# Altium PCB FMCOMMS3.PcbDoc (part 2 of 3)
Units mil, origin at the board's own origin, x right, y up, seen from the top; angles counter-clockwise.
Board outline 3368 x 2770 mil, 4 copper layers (Top Layer, Layer 1, Layer 2, Bottom Layer), stack 23.756 mil thick; 160 components, 137 nets, 746 pads, 735 vias.
Unrouted connection lines stored in the file: 16.
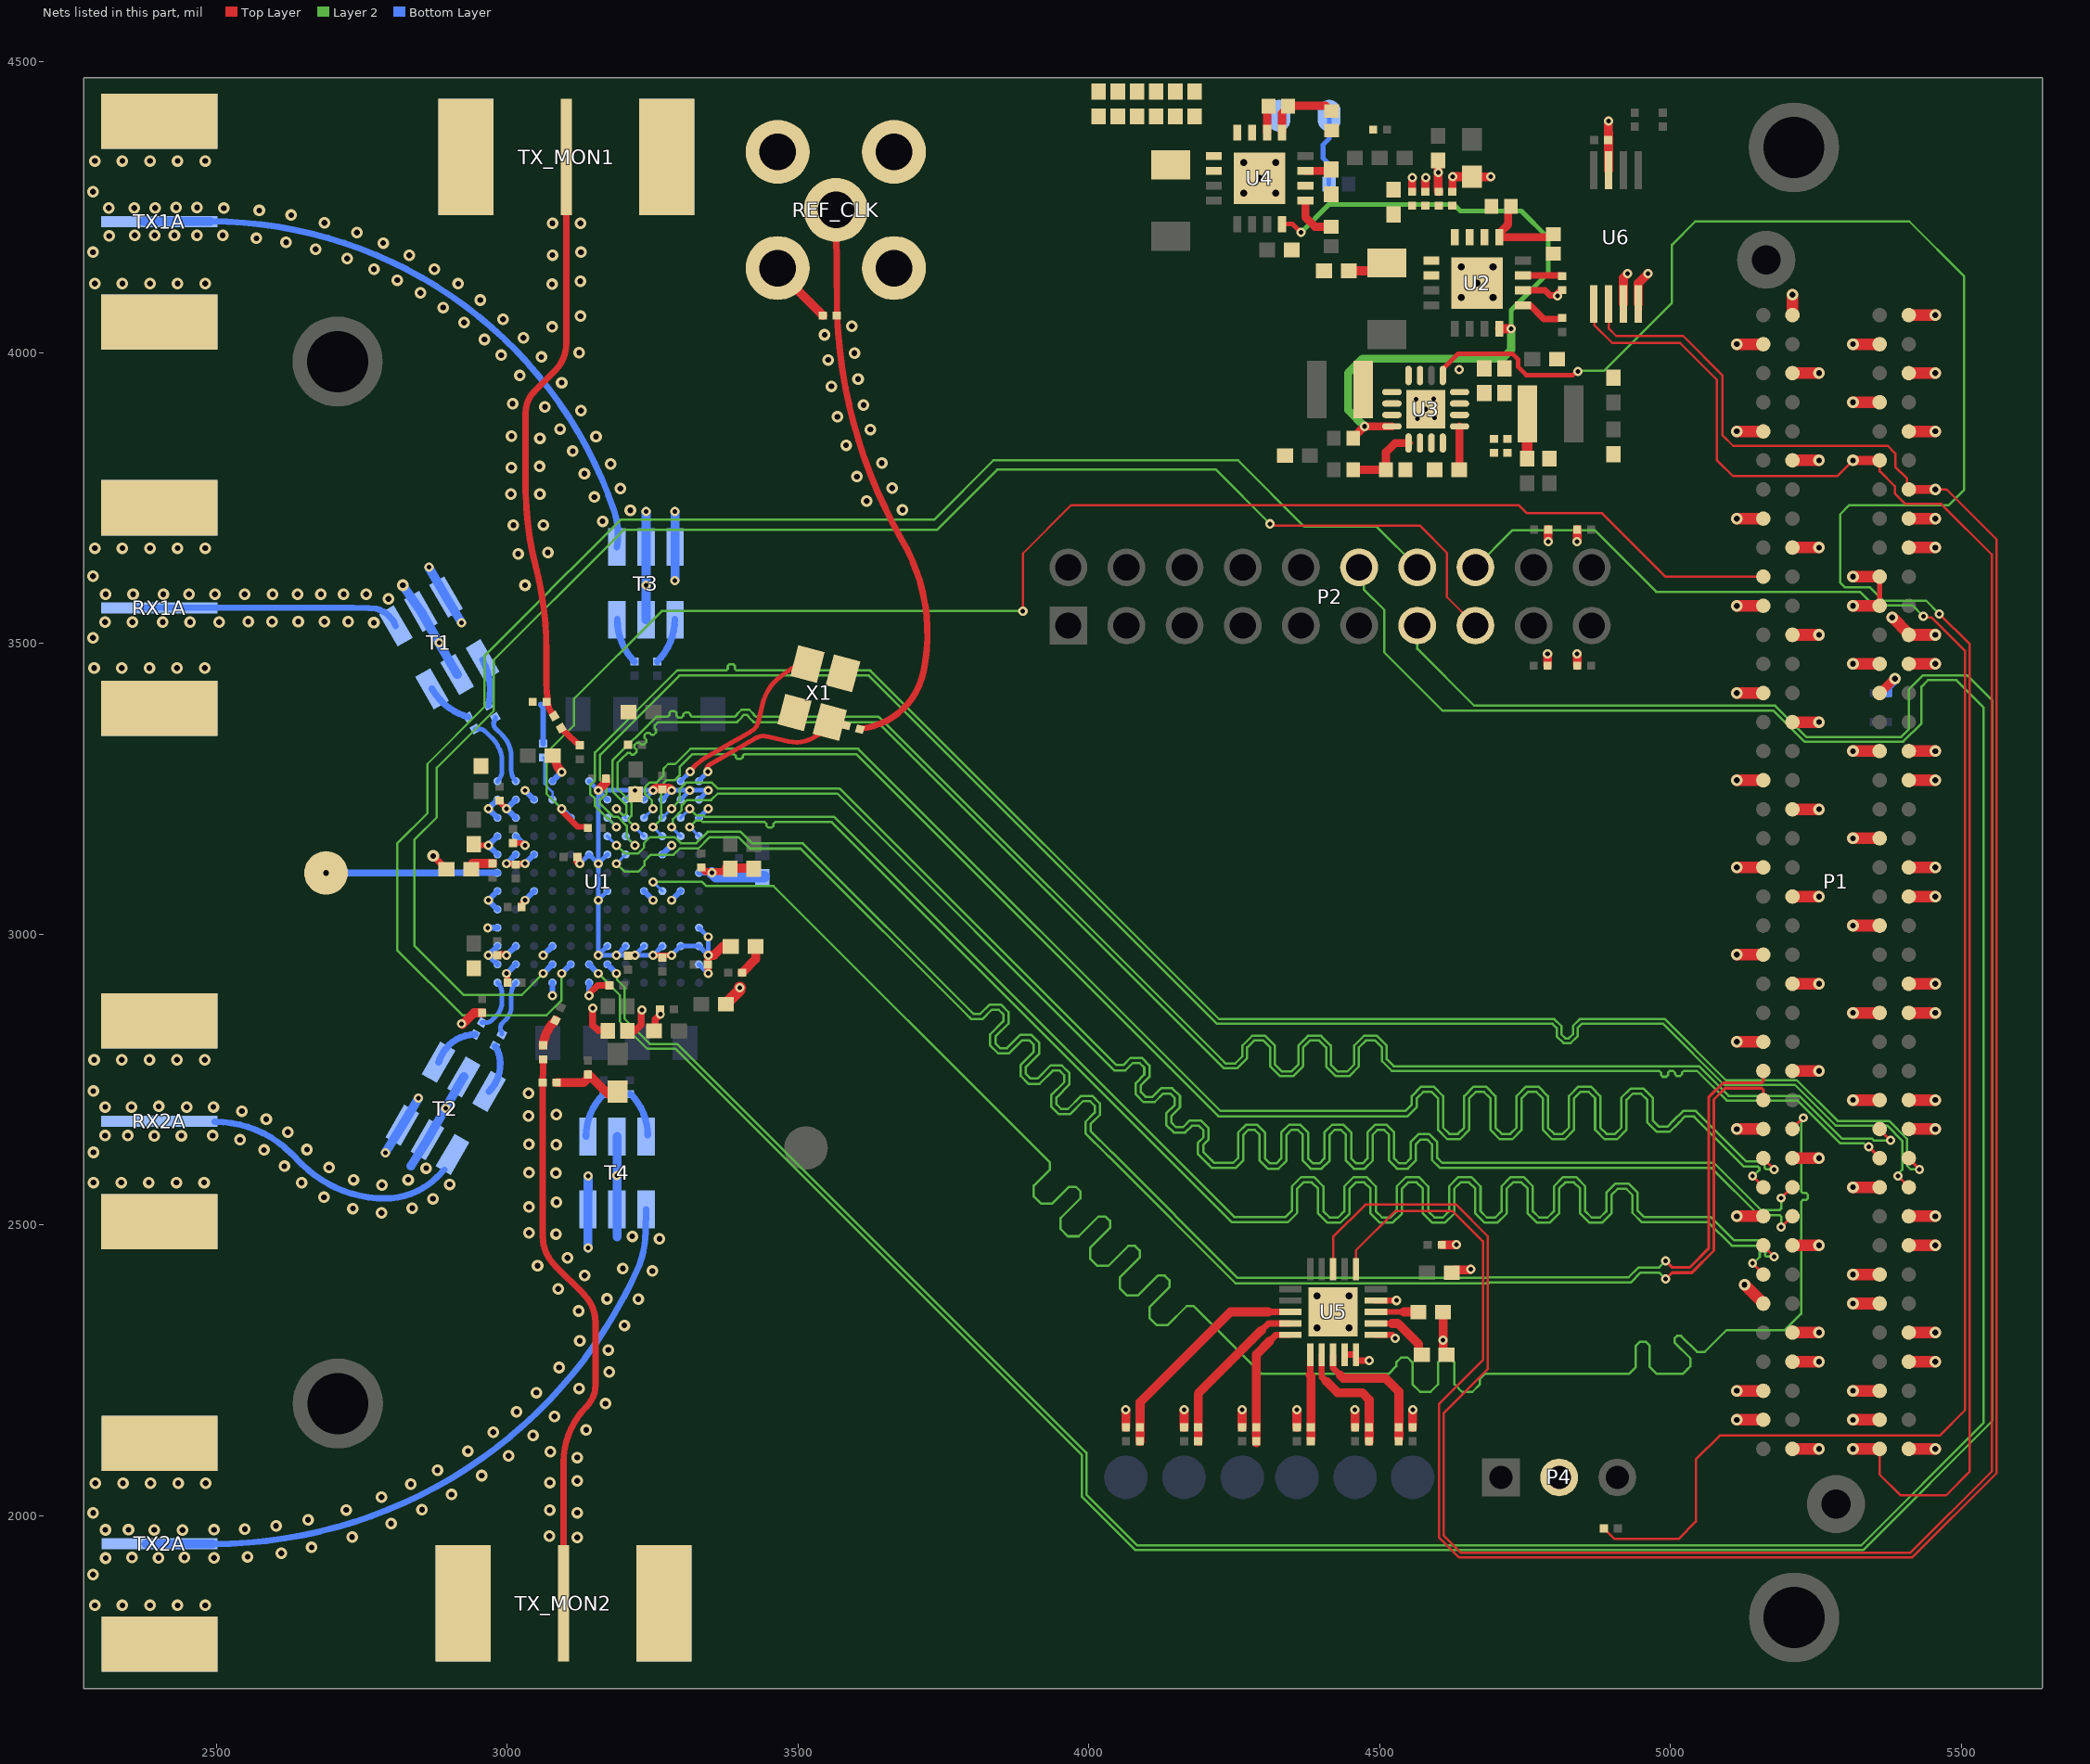
[diagram p4: the nets of this part, all layers, seen from the top]

## Via types
v1: diameter 20, hole 10, Top Layer to Bottom Layer, tented both sides, 410 vias
v2: diameter 15.75, hole 7.87, Top Layer to Bottom Layer, tented both sides, 157 vias
v3: diameter 16, hole 8, Top Layer to Bottom Layer, tented both sides, 154 vias
v4: diameter 28, hole 12, Top Layer to Bottom Layer, 14 vias

## Nets (pads, with @x,y where several pads share a name; then routed paths per layer and width w, separated by ;. In a path a pad name is that pad's centre, name@x,y a point inside that pad or via, vN(x,y) a via of type N, cw(c..) or ccw(c..) an arc to the next point about the centre after c; other vN are vias at no path point) (continued)
FB_CLK_P: P1.G12 U1.F10 | length 3677.6
  Top Layer w4.96: P1.G12@5210,2665.82 v2(5228.54,2684.36)
  Layer 2 w4.02: v2(3251.22,3090) 3251.79,3090.57 3335.02,3090.57 3342.57,3083.02 3457.98,3083.02 3917.5,2623.5 3920.58,2620.42 3933.5,2607.5 3933.5,2595.61 3905.64,2567.75 3905.64,2549.22 3918.27,2536.6 3936.8,2536.6 3966.06,2565.86 3977.95,2565.86 3985.87,2557.93 3985.87,2546.04 3951.61,2511.78 3951.61,2493.25 3964.24,2480.63 3982.77,2480.63 4017.03,2514.89 4028.91,2514.89 4036.84,2506.96 4036.84,2495.07 4002.58,2460.82 4002.58,2442.28 4015.2,2429.66 4033.74,2429.66 4067.99,2463.92 4079.88,2463.92 4087.81,2455.99 4087.81,2444.11 4053.55,2409.85 4053.55,2391.32 4066.17,2378.69 4084.7,2378.69 4118.96,2412.95 4130.85,2412.95 4138.77,2405.03 4138.77,2393.14 4104.52,2358.88 4104.52,2340.35 4117.14,2327.72 4135.67,2327.72 4168.53,2360.58 4180.42,2360.58 4183.5,2357.5 4297,2244 4507.91,2244 4515.59,2244 4528.69,2257.1 4528.69,2263.72 4537.1,2272.13 4548.31,2272.13 4556.71,2263.72 4556.71,2226.12 4569.82,2213.02 4587.67,2213.02 4600.77,2226.12 4600.77,2263.72 4609.18,2272.13 4620.39,2272.13 4628.79,2263.72 4628.79,2226.12 4641.9,2213.02 4659.75,2213.02 4672.85,2226.12 4672.85,2235.59 4681.26,2244 4715.91,2244 4921,2244 4928.68,2244 4940.59,2255.9 4940.59,2292.19 4947.79,2299.4 4957.4,2299.4 4964.61,2292.19 4964.61,2255.9 4976.51,2244 5013.91,2244 5021.34,2244 5029.17,2251.83 5034.6,2257.26 5034.6,2270.7 5007.15,2298.16 5007.15,2304.95 5011.68,2309.48 5018.48,2309.48 5045.93,2282.03 5059.37,2282.03 5092.54,2315.2 5096.83,2319.49 5197.15,2319.49 5225.02,2347.36 5225.02,2526 5225.02,2540.03 5228.02,2543.04 5233.72,2543.04 5236.72,2546.04 5236.72,2552.05 5233.72,2555.06 5228.02,2555.06 5225.02,2558.06 5225.02,2594 5225.02,2677.67 5228.54,2681.19 v2(5228.54,2684.36)
  Bottom Layer w4.96: v2(3251.22,3090) U1.F10@3266.97,3074.25
GA0: P1.C34 U5.11 U6.2 | length 4437.4
  Top Layer w4: U5.11@4459.69,2424.05 4459.69,2456.42 4527.27,2524 4626,2524 4678,2472 4678,2268 4602,2192 4602,1979 4602,1974.37 4602,1963.06 4637.06,1928 4648.37,1928 4653,1928 5415.69,1928 5560.98,2073.29 5560.98,3679.02 5475,3765 v1(5455.82,3765) ; U6.2@4894,4094.68 4894,4042 4907,4029 5022,4029 5090,3961 5090,3858 5108,3840 5374,3840 5387,3827 5387,3803.84 5407.34,3783.5 5407.34,3767.66 P1.C34@5410,3765
  Top Layer w15.5: P1.C34@5410,3765 v1(5455.82,3765)
  Layer 2 w4: v1(5455.82,3765) v1@5455.82,3769.18
GA1: P1.D35 U5.13 U6.1 | length 4508.1
  Top Layer w4: U5.13@4420.31,2424.05 4420.31,2479.55 4475.77,2535 4632,2535 4686,2481 4686,2252 4610,2176 4610,1982.31 4610,1977.69 4610,1966.37 4640.37,1936 4651.69,1936 4656.31,1936 5412.37,1936 5552.98,2076.6 5552.98,3653.02 5466,3740 5404,3740 5386,3758 5386,3770.66 5360.16,3796.5 5360.16,3814.84 P1.D35@5360,3815 ; U6.1@4868.22,4084 4869.16,4083.06 4869.16,4047.84 4900,4017 5017,4017 5080,3954 5080,3816 5108,3788 5287.18,3788 v1(5314.18,3815)
  Top Layer w15.5: v1(5314.18,3815) P1.D35@5360,3815
GND: C1.1 C2.2 C3.2 C4.2 C5.2 C6.2 C7.2 C8.2 C9.2 C10.2 C11.2 C12.2 C13.2 C14.2 C15.2 C16.2 C17.2 C18.2 C19.2 C20.2 C21.2 C22.2 C23.2 C24.2 C25.1 C26.2 C28.1 C29.1 C30.1 C31.2 C32.2 C33.2 C34.2 C35.2 C36.2 C37.2 C38.2 C39.2 C41.2 C42.2 C44.2 C45.2 C47.2 C48.2 C49.2 C50.2 C51.2 C52.2 C53.2 C54.2 C55.2 C56.2 C57.2 C58.2 C59.1 C61.1 C62.2 C63.2 C64.2 C71.1 C72.1 C75.1 C76.1 C77.1 C78.2 C79.1 C81.2 DS1.1 P1.C1 P1.C4 P1.C5 P1.C8 P1.C9 P1.C12 P1.C13 P1.C16 P1.C17 P1.C20 P1.C21 P1.C24 P1.C25 P1.C28 P1.C29 P1.C32 P1.C33 P1.C36 P1.C38 P1.C40 P1.D2 P1.D3 P1.D6 P1.D7 P1.D10 P1.D13 P1.D16 P1.D19 P1.D22 P1.D25 P1.D28 P1.D37 P1.D39 P1.G1 P1.G4 P1.G5 P1.G8 P1.G11 P1.G14 P1.G17 P1.G20 P1.G23 P1.G26 P1.G29 P1.G32 P1.G35 P1.G38 P1.G40 P1.H2 P1.H3 P1.H6 P1.H9 P1.H12 P1.H15 P1.H18 P1.H21 P1.H24 P1.H27 P1.H30 P1.H33 P1.H36 P1.H39 P4.2 R4.1 R7.2 R11.1 R23.2 R24.2 R25.2 R26.2 R27.2 R28.2 R29.1 R30.1 R31.1 R32.1 R33.1 R37.1 R38.1 R40.1 R41.1 REF_CLK.1 REF_CLK.2 REF_CLK.3 REF_CLK.4 RX1A.1 RX1A.2 RX1A.3 RX1A.4 RX2A.1 RX2A.2 RX2A.3 RX2A.4 T1.1 T1.2 T1.5 T2.1 T2.2 T2.5 T3.1 T3.2 T3.5 T4.1 T4.2 T4.5 TX1A.1 TX1A.2 TX1A.3 TX1A.4 TX2A.1 TX2A.2 TX2A.3 TX2A.4 TX_MON1.1 TX_MON1.2 TX_MON1.3 TX_MON1.4 TX_MON2.1 TX_MON2.2 TX_MON2.3 TX_MON2.4 U1.A4 U1.A6 U1.B1 U1.B2 U1.B12 U1.C1 U1.C2 U1.C4 U1.C7 U1.C8 U1.C9 U1.C10 U1.C11 U1.C12 U1.D1 U1.D12 U1.E1 U1.F1 U1.F3 U1.F7 U1.F9 U1.F11 U1.G12 U1.H1 U1.H2 U1.H3 U1.H6 U1.H7 U1.H10 U1.J1 U1.J2 U1.K1 U1.K2 U1.K12 U1.L1 U1.L2 U1.L3 U1.L7 U1.L8 U1.L9 U1.L10 U1.L11 U1.L12 U1.M4 U1.M6 U2.6 U2.17 U3.6 U3.7 U3.8 U3.15 U3.16 U3.20 U4.6 U4.17 U5.4 U5.5 U5.6 U5.9 U5.21 U6.3 U6.4 U6.7 X1.2 X1.4 | length 7797.2
  Top Layer w4: v3(4579.5,3903) 4579.5,3907.5 v3(4593,3921)
  Top Layer w10: C24.2@2943,3154.75 ccw(c2947.25,3159) 2947.25,3152.99 v2(2967.75,3152.99) ; C18.2@2987,3230 ccw(c2991.25,3230) 2988.24,3227 v2(2999.25,3215.99) ; C42.2@2987.48,2965.75 2997.52,2965.75 v2(2999.25,2964.02) ; v2(2999.25,3121.5) v2(3030.74,3121.5) ; C56.2@3000.48,2917.76 v2@3000.48,2931.3 ; C21.2@3011,3157 3021.06,3157 cw(c3021.06,3143.31) v2(3030.74,3152.99) ; C23.2@3026.23,3047.51 3026.23,3053.99 v2(3030.75,3058.51) ; v2(3251.23,2964.01) C26.2@3263.74,2964.01 ; C26.2@3264.72,2964.01 v2(3282.72,2964.01) ; U5.9@4493.84,2370.21 v3(4529.03,2370.21)
  Top Layer w11: v2@3140.98,2896.69 3141.89,2896.69 3141.89,2898.2 3155.69,2912 C11.2@3174,2912 ; U5.4@4440,2277 U5.5@4459.69,2277 4459.69,2267.2 v3(4482.31,2267.19) ; U5.6@4493.84,2311.15 4521.21,2311.15 v3(4526.84,2305.52) ; U2.6@4746.53,4107.47 4784.53,4107.46 4793.27,4098.72 v3@4802.19,4098.72 ; v3@4801.23,4097.76 v3@4802.19,4098.72 ; v3(4806,4097.76) 4805.04,4098.72 v3@4802.19,4098.72 ; C20.2@4811.73,4108.26 v3@4802.19,4098.72
  Top Layer w12: v1(2872.99,3134.76) C77.1@2895.75,3112 ; v2(3147.25,2872.75) 3147.25,2843.75 3157,2834 ; C9.2@3207,2833.75 3219.75,2833.75 3230.75,2844.75 v2@3230.75,2870.25 ; C47.2@3254.75,2830 3254.75,2853.75 v2@3263.5,2862.5 ; C53.2@3334,3115 3341,3108 v2@3349.98,3108 ; v2(3345.71,2932.53) v2(3345.71,2964.02) ; v2@3354.48,3108 3370.98,3108
  Top Layer w14: C15.2@4556,4277 v3@4556,4301 ; C14.2@4579,4277 v3@4579,4301 ; C16.2@4625.62,4278.62 4625.62,4302.62 v3(4626,4303)
  Top Layer w15.5: v2@2923,2845 2943,2865 C57.2@2957,2865 ; C45.2@3078.25,3307 3082.93,3305.06 ccw(c3119.83,3305.06) v2(3093.74,3278.97) ; R40.1@3085,2745 3131.5,2745 3139,2752.5 C72.1@3139,2759 3140,2759 C75.1@3174.64,2724.36 ; R38.1@3121.23,3132.51 3121.23,3125.5 v2(3125.23,3121.49) ; v2(3156.73,3247.47) v2(3156.73,3247.47) 3170,3260.81 C58.2@3170,3268 ; v2(3251.21,3247.48) 3255.21,3251.48 3278.71,3251.48 v2(3282.71,3247.48) ; v2(3345.71,2964.02) 3355.75,2964.02 C79.1@3371.73,2980 ; C52.2@3376.73,3113.75 C50.2@3420.48,3113.75 ; REF_CLK.4@3465,4142.5 R41.1@3543,4064.5 ; R28.2@4064,2152 v3(4064,2182) ; R27.2@4164,2152 v3(4164,2182) ; R26.2@4264,2152 v3(4264,2182) ; R25.2@4358,2152 v3(4358,2182) ; R24.2@4458,2152 v3(4458,2182) ; R23.2@4557,2152 v3(4557,2182) ; C49.2@4601,4330.75 v3(4601,4310.25) 4601,4278 C17.2@4602,4277 ; C63.2@4607,2466 v3(4632.5,2466) ; C62.2@4609.25,2350 4609.35,2349.9 v3(4609.35,2302.08) 4609.35,2281.75 4614.1,2277 C61.1@4615.25,2277 ; C64.2@4624.25,2418 4629,2422.75 4655.58,2422.75 4656.86,2424.03 v3(4657,2424.03) ; v3(4626,4303) 4658.75,4303 C48.2@4659,4302.75 v3@4691.25,4302.75 ; R29.1@4789,3462 v3(4789,3482.5) ; v3(4790,3675.5) R32.1@4790,3696 ; R30.1@4840,3462 v3(4840,3482.5) ; v3(4840,3675.5) R31.1@4840,3696 ; 4893.61,4378.96 v3(4893.61,4398.96) ; U6.7@4893.81,4313.92 4893.81,4378.76 ; U6.3@4919.41,4084 4919.41,4129.26 v3(4926.61,4136.46) ; U6.4@4945,4084 4945,4119.85 v3(4961.61,4136.46)
  Top Layer w20: C22.2@3376.25,2880 v2@3400,2903.75 ; v2@3400,2908.25 v2(3400.34,2908.25) ; v1(5114.18,2165) P1.H2@5160,2165 ; v1(5114.18,2215) P1.H3@5160,2215 ; v1(5114.18,2515) P1.H9@5160,2515 ; v1(5114.18,2665) P1.H12@5160,2665 ; v1(5114.18,2815) P1.H15@5160,2815 ; v1(5114.18,2965) P1.H18@5160,2965 ; v1(5114.18,3115) P1.H21@5160,3115 ; v1(5114.18,3265) P1.H24@5160,3265 ; v1(5114.18,3415) P1.H27@5160,3415 ; v1(5114.18,3565) P1.H30@5160,3565 ; v1(5114.18,3715) P1.H33@5160,3715 ; v1(5114.18,3865) P1.H36@5160,3865 ; v1(5114.18,4015) P1.H39@5160,4015 ; v1(5127.6,2397.4) P1.H6@5160,2365 ; P1.G1@5210,2115 v1(5255.82,2115) ; P1.G4@5210,2265 v1(5255.82,2265) ; P1.G5@5210,2315 v1(5255.82,2315) ; P1.G8@5210,2465 v1(5255.82,2465) ; P1.G11@5210,2615 v1(5255.82,2615) ; P1.G14@5210,2765 v1(5255.82,2765) ; P1.G17@5210,2915 v1(5255.82,2915) ; P1.G20@5210,3065 v1(5255.82,3065) ; P1.G23@5210,3215 v1(5255.82,3215) ; P1.G26@5210,3365 v1(5255.82,3365) ; P1.G29@5210,3515 v1(5255.82,3515) ; P1.G32@5210,3665 v1(5255.82,3665) ; P1.G35@5210,3815 v1(5255.82,3815) ; P1.G38@5210,3965 v1(5255.82,3965) ; P1.G40@5210,4065 v1(5210,4100) ; v1(5314.18,2165) P1.D2@5360,2165 ; v1(5314.18,2215) P1.D3@5360,2215 ; v1(5314.18,2365) P1.D6@5360,2365 ; v1(5314.18,2415) P1.D7@5360,2415 ; v1(5314.18,2565) P1.D10@5360,2565 ; v1(5314.18,2715) P1.D13@5360,2715 ; v1(5314.18,2865) P1.D16@5360,2865 ; v1(5314.18,3015) P1.D19@5360,3015 ; v1(5314.18,3165) P1.D22@5360,3165 ; v1(5314.18,3315) P1.D25@5360,3315 ; v1(5314.18,3465) P1.D28@5360,3465 ; v1(5314.18,3915) P1.D37@5360,3915 ; v1(5314.18,4015) P1.D39@5360,4015 ; v1(5381.73,3545) P1.C29@5410,3516.73 ; P1.C1@5410,2115 v1(5455.82,2115) ; P1.C4@5410,2265 v1(5455.82,2265) ; P1.C5@5410,2315 v1(5455.82,2315) ; P1.C8@5410,2465 v1(5455.82,2465) ; P1.C9@5410,2515 v1(5455.82,2515) ; P1.C12@5410,2665 v1(5455.82,2665) ; P1.C13@5410,2715 v1(5455.82,2715) ; P1.C16@5410,2865 v1(5455.82,2865) ; P1.C17@5410,2915 v1(5455.82,2915) ; P1.C20@5410,3065 v1(5455.82,3065) ; P1.C21@5410,3115 v1(5455.82,3115) ; P1.C24@5410,3265 v1(5455.82,3265) ; P1.C25@5410,3315 v1(5455.82,3315) ; P1.C28@5410,3465 v1(5455.82,3465) ; P1.C29@5410,3515 v1(5455.82,3515) ; P1.C32@5410,3665 v1(5455.82,3665) ; P1.C33@5410,3715 v1(5455.82,3715) ; P1.C36@5410,3865 v1(5455.82,3865) ; P1.C38@5410,3965 v1(5455.82,3965) ; P1.C40@5410,4065 v1(5455.82,4065)
  Bottom Layer w8: v2(3125.23,3121.49) U1.H6@3140.98,3137.24 v2(3156.74,3121.49) ; U1.M6@3140.98,3263.23 v2(3156.73,3247.47) v2(3219.71,3247.48) ; U1.C7@3172.48,2979.76 v2(3156.74,2964.01) ; U1.F7@3172.48,3074.25 v2(3156.74,3058.5) ; U1.H7@3172.48,3137.24 v2(3156.74,3121.49) ; U1.L7@3172.48,3231.73 v2(3156.73,3247.47) v2(3156.74,3121.49) ; U1.C8@3203.97,2979.76 v2(3188.23,2964.01) ; U1.L8@3203.97,3231.73 v2(3219.71,3247.48) ; U1.C9@3235.47,2979.76 v2(3219.73,2964.01) ; U1.L9@3235.47,3231.73 v2(3251.21,3247.48) ; U1.C10@3266.97,2979.76 v2(3251.23,2964.01) v2(3219.73,2964.01) ; U1.L10@3266.97,3231.73 v2(3282.71,3247.48) ; v2(3282.72,2964.01) U1.C11@3298.46,2979.76 U1.C12@3329.96,2979.76 v2(3345.71,2964.02) v2(3345.71,2995.52) U1.D12@3329.96,3011.26 ; U1.L11@3298.46,3231.73 v2(3314.2,3247.48) ; U1.B12@3329.96,2948.27 v2(3345.71,2932.53) ; U1.K12@3329.96,3200.24 v2(3345.7,3215.99) ; U1.L12@3329.96,3231.73 v2(3345.7,3247.48) v2(3314.2,3247.48) ; v2(3156.74,2964.01) v2(3156.74,3058.5) ; v2(3156.74,2964.01) v2(3188.23,2964.01) ; v2(3156.74,3058.5) v2(3156.74,3121.49) ; v2(3188.23,2964.01) v2(3219.73,2964.01) ; v2(3219.71,3247.48) v2(3251.21,3247.48) ; v2(3251.21,3247.48) v2(3282.71,3247.48) ; v2(3282.71,3247.48) v2(3314.2,3247.48)
  Bottom Layer w10: v2(2966.73,3011.26) U1.D1@2983.5,3011.26 ; U1.B1@2983.5,2948.27 v2(2967.75,2964.02) U1.C1@2983.5,2979.76 ; U1.E1@2983.5,3042.76 v2(2967.76,3058.5) U1.F1@2983.5,3074.25 ; U1.H1@2983.5,3137.24 v2(2967.75,3152.99) U1.J1@2983.5,3168.74 ; U1.K1@2983.5,3200.24 v2(2967.75,3215.99) U1.L1@2983.5,3231.73 ; v2(2999.25,2932.53) U1.B2@3015,2948.27 ; v2(2999.25,2964.02) U1.C2@3015,2979.76 ; v2(2999.25,3121.5) U1.H2@3015,3137.24 ; U1.J2@3015,3168.74 v2(3030.74,3152.99) ; U1.K2@3015,3200.24 2999.26,3215.99 U1.L2@3015,3231.73 ; v2(3030.75,3058.51) U1.F3@3046.49,3074.25 ; v2(3030.74,3121.5) U1.H3@3046.49,3137.24 ; v2(3030.75,3247.48) U1.L3@3046.49,3231.73 ; 3058,3395 3062,3391 R33.1@3062,3328 ; v2(3062.24,2964.02) U1.C4@3077.99,2979.76 ; v2(3077.99,2894.5) U1.A4@3077.99,2916.77 ; U1.M4@3077.99,3263.23 v2(3093.74,3278.97) ; v2(3140.98,2894.5) U1.A6@3140.98,2916.77 ; U1.F9@3235.47,3074.25 v2(3251.21,3058.51) ; U1.H10@3266.97,3137.24 v2(3282.71,3152.99) ; v2(3282.72,3058.51) U1.F11@3298.46,3074.25 ; U1.G12@3329.96,3105.75 v2(3352.23,3105.75)
  Bottom Layer w15.5: v3(2790.56,2624.31) T2.1@2819.8,2671.58 v3(2847.56,2718.31) ; v1(2820.57,3600.36) T1.2@2851.82,3555.21 v3(2883.07,3501.08) T1.5@2914.32,3446.95 ; 2834.56,2601.31 T2.2@2863.1,2646.58 v3(2894.35,2700.71) T2.5@2925.61,2754.84 ; v3(2865.57,3631.08) T1.1@2895.12,3580.21 v3(2921.57,3536.08) ; v3(3139,2460.7) T4.1@3139,2526.99 v3(3139.23,2584.47) ; 3189,2479.7 v3(3189,2585.47) T4.5@3189,2652 ; v3(3238.78,3727.5) 3238.78,3727.36 3239,3727.14 v3(3239,3600.52) T3.5@3239,3541 ; v3(3288.78,3608.52) T3.1@3289,3666.01 3289,3727.28 v3(3288.78,3727.5)
  Bottom Layer w20: v2(3352.23,3105.75) 3359.23,3098.75 C54.2@3439,3098.75 C54.2@3441.73,3098.75
  other v1: 2291,1846 2338.5,1846 2386,1846 2433.5,1846 2481,1846 2287.91,1898.8 2309.81,1927.16 2355.02,1928 2400.72,1927.67 2445.42,1928.17 2495.98,1927.66 2553.9,1929.51 2611.83,1935.7 2663.9,1945.58 2733.54,1963.32 3120.76,1962.81 3072.65,1965.15 2309.27,1975.83 2349,1976 2393.35,1975.69 2441.79,1975.56 2496,1976 2549.15,1976.9 2602.7,1982.55 2800.51,1986.59 2657.73,1992.91 2288.28,2004.75 3120.57,2005.21 2723.65,2010 2853.74,2010.37 3073.27,2009.73 2784.2,2032.2 2904.64,2036.48 2834.65,2054.26 2292,2056 2339.5,2056 2387,2056 2434.5,2056 2482,2056 3073.45,2057.03 3120.57,2059.86 2956.54,2069.13 2880.26,2078.21 3120.76,2100.19 3002.41,2103.12 3074.21,2109.99 2932.73,2111.31 3044.6,2138.27 2976.46,2143.87 3136.02,2147.87 3081.43,2170.92 3016.39,2178.68 3169.38,2192.91 3050.51,2211.85 3123.62,2218.97 3175.8,2247.37 3089.42,2254.98 3173.9,2285.19 3125,2301 3201.59,2327.47 3122.97,2352.27 3225.55,2372.41 3172,2373 3088.04,2389.92 3133.46,2413.06 3250,2421 3199,2425 3052.4,2430.17 3103.71,2443.39 3262.05,2476.17 3215.15,2480.56 3084.16,2484.5 3037.74,2486.65 2784,2521 2734.87,2528.31 2837,2529 3037.6,2530.92 3085.03,2539.4 2872.64,2545.12 2685.17,2547.68 2784.91,2568.8 2901.33,2569.79 2289,2573 2336.5,2573 2384,2573 2431.5,2573 2479,2573 2646.62,2572.89 2735.91,2577.8 2829.91,2577.8 3084.12,2589.15 3037.74,2590.03 2860.91,2597.8 2693.91,2598.8 2617.02,2601.21 2288.6,2624.98 2581.93,2629.02 2655.91,2629.8 3084.47,2638.34 3037.39,2638.86 2540.79,2646.57 2393.58,2653.42 2308.91,2653.8 2347.91,2653.8 2439.96,2653.63 2493.6,2653.83 2622.91,2659.8 2585.91,2681.8 3037.04,2687.7 3084.64,2690.16 2543.91,2695.8 2309,2703 2354,2703 2448.91,2702.8 2495,2703 2401,2704 3036.87,2726.69 2288.45,2730.43 2290,2784 2337.5,2784 2385,2784 2432.5,2784 2480,2784 2290,3458 2337.5,3458 2385,3458 2432.5,3458 2480,3458 2287.91,3509.8 2770.91,3535.8 2308.91,3536.8 2355.91,3536.8 2407.91,3536.8 2454.91,3536.8 2504.91,3536.8 2554.91,3537.8 2595.91,3537.8 2640.91,3537.8 2685.91,3537.8 2726.91,3537.8 2796,3577 2309.91,3584.8 2357,3585 2408.91,3584.8 2452.91,3584.8 2497.91,3584.8 2548.91,3584.8 2596.91,3584.8 2639.91,3584.8 2679.91,3584.8 2718.91,3584.8 2757.91,3584.8 3030.89,3600.34 2287.91,3615.8 3019.05,3653.99 3070.11,3656.58 2291,3664 2338.5,3664 2386,3664 2433.5,3664 2481,3664 3010.91,3703.58 3062.34,3703.95 3164.2,3710.27 3211.91,3729 3679.88,3729.97 3618.12,3745.17 3150,3752 3006.47,3756.86 3056.42,3756.86 3194.91,3766.8 3662.1,3767.63 3601.71,3787.01 3133,3792 3007.21,3802.74 3055.68,3804.59 3177.91,3808.8 3644.32,3810.44 3113,3831 3582.86,3841.14 3056.42,3853.07 3152.91,3855.8 3007.58,3856.77 3624.69,3868.15 3091,3869 3568,3890 3126.91,3900.8 3065,3907 3612.95,3910.38 3009.43,3912.64 3557.73,3942.38 3093.91,3948.8 3603.47,3954.88 3022,3961 3552.17,3987.81 3058.91,3992.8 2990,3996 3124.03,4000.27 3597.29,3999.58 2961,4023 3027.91,4025.8 3546,4031 3077.51,4044.7 3592.86,4045.56 2926,4052 2992.91,4057.8 3126,4063 2890,4078 2953.91,4090.8 2851,4103 3077.32,4118 2291,4119 2338.5,4119 2386,4119 2433.5,4119 2481,4119 2915.91,4118.8 3125.93,4122.93 2811,4125 2771,4144 2874.91,4143.8 2725,4162 2831.91,4167.8 3078,4168 2288,4173 3127,4173 2671,4178 2786.91,4188.8 2620,4190 2569,4197 2316,4201 2360,4202 2394,4202 2428,4202 2467,4202 2511,4202 2741.91,4206.8 3078,4223 3126,4223 2685.91,4223.8 2628.91,4236.8 2573.91,4244.8 2315,4249 2359,4249 2395,4249 2512.91,4248.8 2431,4250 2466.91,4249.8 2288,4277 2291,4330 2338.5,4330 2386,4330 2433.5,4330 2481,4330
  other v2: 2921.77,2846.23 3263.44,2862.72 3232,2870
  other v3: 4565,3887 4595,3888 4563,3920 4637,3971 4556.38,4301.38 4579.38,4301.38 4691.5,4303
  other v4: 4393,2323 4448,2323 4393,2378 4448,2378 4640.29,4095.26 4695.29,4095.26 4667.79,4120.26 4640.29,4147.76 4695.29,4147.76 4266.5,4275 4321.5,4275 4294,4300 4266.5,4327.5 4321.5,4327.5
GPO0: P2.12 U1.B7 | length 5535.6
  Layer 2 w4: v2(3188.23,2932.52) 3189.17,2931.58 3189.17,2921.83 3202,2909 3202,2855 3246,2811 3293.22,2811 3996,2108.22 3996,2036.69 4083.69,1949 5328.06,1949 5539,2159.94 5539,3390 5492,3437 5443,3437 5432,3426 5432,3363 5400.5,3331.5 5230.5,3331.5 5177,3385 4608,3385 4508.25,3484.75 4508.25,3557.75 4473.5,3592.5 4473.5,3622.5 P2.12@4465,3631
  Bottom Layer w10: U1.B7@3172.48,2948.27 v2(3188.23,2932.52)
GPO1: P2.13 U1.B6 | length 5422.7
  Layer 2 w4: v2(3156.73,2932.52) 3194,2895.25 3194,2850 3241,2803 3289.91,2803 3988,2104.91 3988,2033.37 4080.37,1941 5331.37,1941 5339.37,1949 5554,2163.63 5554,3402 5511,3445 5434,3445 5410.59,3421.59 5410.59,3352.91 5397.19,3339.5 5233.81,3339.5 5180.31,3393 4663,3393 4565,3491 P2.13@4565,3531
  Bottom Layer w10: U1.B6@3140.98,2948.27 v2(3156.73,2932.52)
GPO2: P2.14 U1.B5 | length 2795.6
  Layer 2 w4: v2(3093.74,2932.53) 3094,2932.27 3093.74,2932.01 3093.74,2886.74 3068,2861 2923,2861 2811,2973 2811,3156 2863,3208 2863,3292.94 2961,3390.94 2961,3478.51 3074.25,3591.75 3074.25,3592.25 3140,3658 3140.37,3658 3195.37,3713 3734,3713 3836,3815 4257,3815 4371,3701 4495,3701 P2.14@4565,3631
  Bottom Layer w10: v2(3093.74,2932.53) U1.B5@3109.49,2948.27
GPO3: P2.15 U1.B4 | length 2821.5
  Top Layer w4: v3(4312,3706) 4312.97,3706.97 4316.28,3706.97 4320.25,3703 4569,3703 4616,3656 4616,3580 P2.15@4665,3531
  Layer 2 w4: v2(3062.24,2932.53) 3025.71,2896 2925,2896 2841,2980 2841,3163 2879,3201 2879,3286.31 2977,3384.31 2977,3471.88 3183,3677.88 3183,3678 3201,3696 3739.63,3696 3842.63,3799 4219,3799 v3(4312,3706)
  Bottom Layer w10: v2(3062.24,2932.53) U1.B4@3077.99,2948.27
NetC4_1: C4.1 C5.1 C6.1 C28.2 E1.2 L1.2 U3.10 U3.11 U3.12 | length 76.8
  Top Layer w18: E1.2@4754,3818.25 L1.2@4754,3895
NetC12_1: C12.1 C13.1 C14.1 C15.1 C16.1 C17.1 R1.1 R2.2 U2.10 U2.11 U2.12 U2.13 U2.14 | length 71.3
  Top Layer w15.5: C13.1@4447.25,4141 4499.5,4141 R1.1@4513,4154.5
NetC20_1: C20.1 U2.7 | length 66.9
  Top Layer w11: U2.7@4746.53,4133.06 C20.1@4813.43,4133.06
NetC29_2: C29.2 U3.9 | length 74.6
  Top Layer w14: C29.2@4637.25,3799 4637.42,3799.17 4637.42,3852.83 4637.6,3853 U3.9@4637.6,3873.5
NetC31_1: C31.1 C32.1 C33.1 C34.1 C35.1 C36.1 R8.1 R9.2 U4.10 U4.11 U4.12 U4.13 U4.14 | length 46.3
  Top Layer w14: U4.10@4306.8,4378.74 4306.91,4378.85 4306.91,4421.64 R9.2@4309.27,4424
NetC39_1: C39.1 U4.7 | length 45.3
  Top Layer w14: U4.7@4372.74,4312.8 4372.85,4312.91 4414.66,4312.91 C39.1@4417,4315.25
NetC60_1: C60.1 P2.16 | length 3042.8
  Top Layer w4: C60.1@4886,1978 4904,1960 5014,1960 5044,1990 5044,2097 5085,2138 5463,2138 5507,2182 5507,3487 5449,3545 5437,3545 v3(5435,3547)
  Layer 2 w4: P2.16@4665,3631 4729,3695 4870,3695 4976,3589 5326,3589 5349,3566 5416,3566 v3(5435,3547)
NetC61_2: C61.2 U5.7 | length 107.7
  Top Layer w10: U5.7@4493.84,2330.84 4521.53,2330.84
  Top Layer w15.5: 4521.53,2330.84 4531.53,2330.84 4567.09,2295.28 C61.2@4567.09,2275.53
NetC62_1: C62.1 U5.8 | length 74.2
  Top Layer w10: U5.8@4493.84,2350.52 4541.84,2350.52
  Top Layer w15.5: 4541.84,2350.52 C62.1@4568.09,2350.52
NetC65_2: C65.2 T1.6 | length 80.7
  Bottom Layer w11.55: T1.6@2957.62,3471.95 cw(c2854.31,3417.17) 2970.36,3431.55 cw(c2873.51,3419.55) C65.2@2967.64,3393.78
NetC66_2: C66.2 T1.4 | length 80.5
  Bottom Layer w11.55: T1.4@2871.02,3421.95 ccw(c2961.2,3474.02) 2908.92,3383.96 ccw(c2961.15,3473.93) C66.2@2933,3373.78
NetC67_2: C67.2 T2.6 | length 84.6
  Bottom Layer w11.55: T2.6@2882.31,2779.84 cw(c2945.83,2761.72) 2920.56,2822.75 cw(c2945,2763.73) C67.2@2945,2827.61
NetC68_2: C68.2 T2.4 | length 84.6
  Bottom Layer w11.55: T2.4@2968.91,2729.84 ccw(c2924.25,2775.63) 2988.16,2778.25 ccw(c2933.31,2778.25) C68.2@2979.64,2807.61
NetC69_2: C69.2 T3.6 | length 80.9
  Bottom Layer w11.55: C69.2@3258,3469 ccw(c3186.22,3541.72) T3.6@3288.4,3541.72
NetC70_2: C70.2 T3.4 | length 80.5
  Bottom Layer w11.55: T3.4@3189.4,3541.72 ccw(c3293.53,3541.72) C70.2@3219,3469
NetC73_2: C73.2 T4.6 | length 80.9
  Bottom Layer w11.55: T4.6@3135.6,2652.28 cw(c3237.78,2652.28) C73.2@3166,2725
NetC74_2: C74.2 T4.4 | length 79.4
  Bottom Layer w11.55: C74.2@3211,2725 3213.65,2723.88 cw(c3142.8,2654.75) T4.4@3241.79,2654.75
NetC77_2: C77.2 R34.2 | length 34.8
  Top Layer w15.5: C77.2@2940.25,3122 R34.2@2975,3122
NetC79_2: C79.2 R35.2 | length 54.5
  Top Layer w15.5: R35.2@3404,2934 3427.5,2957.5 C79.2@3427.5,2978.75
NetC80_1: C80.1 R36.2 | length 44.5
  Top Layer w11: R36.2@3092.25,3355.11 ccw(c3467.09,3729.95) C80.1@3125,3325
NetC82_1: C82.1 R39.2 | length 49.2
  Top Layer w15.5: R39.2@3061.75,2808.75 cw(c3135.42,2799.63) C82.1@3082.93,2852.12
NetC83_1: C83.1 U1.M12 X1.1 | length 274
  Top Layer w8: v2@3345.71,3278.98 cw(c3351.62,3284.33) 3347.64,3291.23 3373.83,3306.33 3391.3,3316.4 3426.58,3336.81 cw(c3441.74,3310.61) 3449.87,3339.77 3484.25,3331.69 ccw(c3497.25,3387.01) 3519.46,3334.7 3536.42,3343.34 X1.1@3555.24,3359.48 ; X1.1@3553,3367 3554.64,3366.55 X1.1@3554.64,3371.28
  Bottom Layer w8: U1.M12@3329.96,3263.23 3329.96,3264.09 3345,3279.14 v2(3345,3280)
NetC83_2: C83.2 R41.2 REF_CLK.5 | length 979.8
  Top Layer w11: REF_CLK.5@3565.25,4245.75 cw(c-4533.75,4065.75) 3567.25,4065.75 ccw(c4414.81,4099.96) 3680.25,3675.75 cw(c3405.39,3517.03) 3715.77,3450.64 cw(c3594.86,3476.51) C83.2@3606.36,3353.4
NetDS1_2: DS1.2 R13.1 | length 126.7
  Bottom Layer w8: R13.1@4413.27,4290 4413.27,4324.73 4403,4335 4403,4358.01 4413.43,4368.44 4413.43,4407.81 DS1.2@4413.62,4408
NetL2_1: L2.1 U3.1 U3.2 U3.3
NetP1_D27: P1.D27 R14.1 | length 65.5
  Top Layer w15.5: P1.D27@5361.73,3415 5361.73,3415.86 5385.6,3439.74 v1(5386.47,3439.74)
  Bottom Layer w15.5: R14.1@5373.73,3415 5373.73,3425.78 5386.47,3438.52 v1(5386.47,3439.74)
NetP1_D30: P1.D30 P1.D31 | length 141.6
  Top Layer w9: P1.D30@5360,3565 P1.D31@5360,3615
  Top Layer w20: v1(5314.18,3565) P1.D30@5360,3565 ; v1(5314.18,3615) P1.D31@5360,3615
NetR2_1: R2.1 R4.2 U2.9 | length 156.1
  Top Layer w14: R2.1@4726,4252 4721.19,4247.19 4721.19,4220.68 4706.18,4205.67 U2.9@4706.18,4199 4793.02,4199 4798.02,4204 R4.2@4799,4204
NetR6_2: R6.2 R7.1 U3.5 | length 132
  Top Layer w14: R6.2@4454.73,3799 R7.1@4511.27,3799 4511.27,3829.27 4526.9,3844.9 U3.5@4550,3844.9
NetR9_1: R9.1 R11.2 U4.9 | length 129.1
  Top Layer w14: U4.9@4332.39,4378.74 4332.39,4412.67 4342.73,4423.02 R9.1@4342.73,4424 4343.73,4425 4407.75,4425 4417.02,4415.73 R11.2@4418,4415.73
NetR17_2: R17.2 R23.1 U5.3 | length 270.3
  Top Layer w11: U5.3@4420.31,2277 4420.31,2254 4432.81,2241.5
  Top Layer w15.5: 4432.81,2241.5 4437.81,2236.5 4510.31,2236.5 4533.31,2213.5 4533.31,2186.5 R23.1@4533.31,2151 ; R17.2@4533.31,2132.5 R23.1@4533.31,2151 ; 4533.31,2187.5 R23.1@4533.31,2151
NetR18_2: R18.2 R24.1 U5.2 | length 240.2
  Top Layer w11: U5.2@4400.63,2277 4400.62,2238.69 4407.81,2231.5
  Top Layer w15.5: 4407.81,2231.5 4427.81,2211.5 4470.31,2211.5 4482.31,2199.5 4482.31,2186.5 R24.1@4482.31,2157 ; R18.2@4482.31,2128 R24.1@4482.31,2153 ; 4482.31,2185.5 R24.1@4482.31,2157 ; R24.1@4482.31,2153 R24.1@4482.31,2157 ; R24.1@4482.31,2153 R24.1@4482.31,2157
NetR19_2: R19.2 R25.1 U5.1 | length 180.6
  Top Layer w11: 4380.94,2242.13 U5.1@4380.94,2277
  Top Layer w15.5: 4380.94,2242.13 4382.31,2240.76 4382.31,2186.5 ; R19.2@4382.31,2131.5 R25.1@4382.31,2152 ; R25.1@4382.31,2152 4382.31,2186.5 ; R25.1@4382.31,2152 4382.31,2186.5
NetR20_2: R20.2 R26.1 U5.20 | length 224.4
  Top Layer w11: 4311.29,2300.52 4321.92,2311.15 U5.20@4346.79,2311.15
  Top Layer w15.5: R20.2@4288.29,2125.52 4288.29,2153 4288.29,2180.52 4288.29,2277.52 4311.29,2300.52
NetR21_2: R21.2 R27.1 U5.19 | length 290.5
  Top Layer w11: 4297.54,2319.27 4309.1,2330.83 U5.19@4346.79,2330.84
  Top Layer w15.5: R21.2@4188.29,2128.02 4188.29,2154 4188.29,2180.52 4188.29,2210.02 4297.54,2319.27
NetR22_2: R22.2 R28.1 U5.18 | length 389.9
  Top Layer w11: 4308.79,2350.52 U5.18@4346.79,2350.52
  Top Layer w15.5: R22.2@4088.29,2128.02 4088.29,2180.52 4088.29,2195.02 4243.79,2350.52 4308.79,2350.52
NetR33_2: R33.2 U1.L4 | length 78.9
  Bottom Layer w4: R33.2@3062,3304 3064,3302 3064,3258.84 3077.99,3244.85 U1.L4@3077.99,3231.73
NetR36_1: R36.1 R37.2 TX_MON1.5 | length 1048.4
  Top Layer w11: R36.1@3081,3375.39 cw(c3108.78,3403.17) 3069.5,3402.5 ccw(c2961.03,3402.46) 3068.62,3416.25 cw(c3176.23,3429.96) 3067.75,3430 3067.75,3486.25 ccw(c2482.6,3486.25) 3049.5,3631.25 cw(c3597.51,3771.42) 3032,3758.75 3032,3897.54 cw(c3083.21,3897.54) 3047,3933.75 3082,3968.75 ccw(c3033.72,4017.03) 3102,4017.03 TX_MON1.5@3102,4393.75
NetR39_1: R39.1 R40.2 TX_MON2.5 | length 1048.1
  Top Layer w11: R39.1@3062,2785 cw(c2161.25,2785) 3061.25,2748.25 3061.25,2480.84 ccw(c3132.09,2480.84) 3082,2430.75 3132,2380.75 cw(c3083.72,2332.47) 3152,2332.47 3152,2224.46 cw(c3100.79,2224.46) 3137,2188.25 ccw(c3233.57,2091.68) 3097,2091.68 TX_MON2.5@3097,1783.25
NetRX1A_5: RX1A.5 T1.3 | length 458.6
  Bottom Layer w11: RX1A.5@2363.07,3561.61 2734.97,3561.61 2762.61,3560.83 2774.95,3560.05 cw(c2762.67,3512.44) T1.3@2808.52,3530.21
NetRX2A_5: RX2A.5 T2.3 | length 448.3
  Bottom Layer w11: RX2A.5@2497,2677.7 cw(c2497,2491.37) 2628.75,2623.13 2646.76,2605.12 ccw(c2790.15,2748.52) 2790.16,2545.73 ccw(c2790.16,2673.32) 2880.38,2583.1 T2.3@2892.44,2595.16
NetT3_3: T3.3 TX1A.5 | length 1090.4
  Bottom Layer w11: TX1A.5@2489.28,4226.03 cw(c2489.28,3492.27) 3183.65,3729.44 cw(c3059.48,3687.02) T3.3@3189,3666.01
  Bottom Layer w15.5: TX1A.5@2374.28,4226.03 TX1A.5@2489.28,4226.03
NetT4_3: T4.3 TX2A.5 | length 1139.7
  Bottom Layer w11: TX2A.5@2493.73,1951.47 ccw(c2493.73,2752.58) 3227.23,2430.47 ccw(c3061.15,2492.01) 3238.23,2488.47 T4.3@3239,2526.99
  Bottom Layer w15.5: TX2A.5@2378.73,1951.47 TX2A.5@2493.73,1951.47
NetU1_M11: U1.M11 X1.3 | length 320.5
  Top Layer w8: v2@3314.21,3278.98 cw(c3381.41,3232.64) 3340.64,3303.36 3366.83,3318.46 3384.29,3328.54 3391.69,3332.8 3396.07,3335.34 3419.57,3348.93 ccw(c3406.22,3372.01) 3432.68,3368.71 3441.02,3402.57 cw(c3520.05,3376.9) 3472.09,3444.76 3512.38,3473.08 3516.2,3469.26 X1.3@3518.2,3469.26
  Bottom Layer w8: U1.M11@3298.46,3263.23 3298.46,3263.34 3315,3279.89 v2(3315,3280)
PG_1P3_A: R3.2 U2.5 | length 59.3
  Top Layer w11: U2.5@4758,4083 4782.61,4058.39 R3.2@4807.11,4058.39
PG_1P3_B: R10.2 U4.5 | length 79.5
  Top Layer w14: U4.5@4372.74,4261.61 4372.74,4233.26 4389.27,4216.73 R10.2@4417,4216.73
PG_1P8V: R5.2 U2.4 U3.4 U4.4 | length 1222.1
  Top Layer w8: U4.4@4332.39,4221.26 4350.74,4221.26 v3(4365,4207)
  Top Layer w14: R5.2@4454.73,3853 4454.73,3853.98 v3(4474.25,3873.5) U3.4@4521.4,3873.5
  Top Layer w15.5: U2.4@4706.18,4041.52 v3(4726.29,4041.52)
  Layer 2 w8: v3(4365,4207) 4413,4255 4628,4255 4639,4244 4744,4244 4790,4198 4790,4137 4726.29,4073.29 v3(4726.29,4041.52)
  Layer 2 w14: v3(4474.25,3873.5) 4446,3901.75 4446,3965 4471,3990 4711,3990 4726.29,4005.29 v3(4726.29,4041.52)
PG_FMC: P1.D1 U3.13 | length 3828.6
  Top Layer w4: P1.D1@5360,2115 5360,2071 5396,2035 5474,2035 5515,2076 5515,3498.8 v3(5462.8,3551)
  Top Layer w8: U3.13@4609,3961.1 4609.98,3962.08 4609.98,3973.33 4634.65,3998 4729,3998 4738,3989 4738,3976.19 4752.19,3962 4832.84,3962 4838.84,3968 v3(4841,3968)
  Top Layer w20: v1(5314.18,2115) P1.D1@5360,2115
  Layer 2 w4: v3@4841,3969 4886,3969 5003,4086 5003,4186 5043,4226 5411,4226 5505,4132 5505,3764 5479,3738 5308,3738 5292,3722 5292,3605 5300,3597 5343,3597 5366,3574 5439.8,3574 v3(5462.8,3551)
RESETB: P1.H31 R42.2 U1.K5 | length 2594.4
  Top Layer w4: v3(3887,3556) 3887,3655 3970,3738 4739.31,3738 4753.31,3724 4883,3724 4992,3615 P1.H31@5160,3615
  Top Layer w10: v2(3093.75,3215.99) 3094.85,3214.89 3094.85,3211.2 3121.05,3185 3137,3185 R42.2@3139,3183
  Layer 2 w4: v2(3093.75,3215.99) 3093.7,3215.99 3068,3241.69 3068,3312.31 3115,3359.31 3115,3405 3266,3556 v3(3887,3556)
  Bottom Layer w10: v2(3093.75,3215.99) U1.K5@3109.49,3200.24
RX1A_N: C65.1 U1.M2 | length 122.4
  Bottom Layer w8: C65.1@2979.64,3373 2979.64,3370.21 cw(c2975.13,3370.21) 2978.32,3367.02 ccw(c2981.51,3363.84) 2977,3363.84 2977,3361.48 ccw(c2987.19,3361.48) 2979.98,3354.28 2992.14,3342.12 cw(c2955.58,3305.56) 3007.29,3305.56 3007.29,3281.84 ccw(c3033.61,3281.84) U1.M2@3015,3263.23
RX1A_P: C66.1 U1.M1 | length 116
  Bottom Layer w8: C66.1@2945,3353 2945.21,3353.21 2951.76,3353.21 cw(c2951.76,3337.41) 2962.94,3348.58 2974.76,3336.76 cw(c2935.05,3297.05) 2991.21,3297.05 2991.21,3281.84 cw(c2964.89,3281.84) U1.M1@2983.5,3263.23
RX2A_N: C67.1 U1.A1 | length 90.2
  Bottom Layer w8: C67.1@2957,2848.39 2957.08,2848.31 2963.63,2848.31 ccw(c2963.63,2864.12) 2974.81,2852.94 2980.69,2858.83 ccw(c2955.3,2884.22) 2991.21,2884.22 2991.21,2898.16 ccw(c2964.89,2898.16) U1.A1@2983.5,2916.77
RX2A_P: C68.1 U1.A2 | length 97
  Bottom Layer w8: C68.1@2991,2828.39 2991,2831.31 ccw(c2986.81,2831.31) 2989.77,2834.28 cw(c2992.73,2837.24) 2988.55,2837.24 2988.55,2839.72 cw(c2998.73,2839.72) 2991.53,2846.92 2997.92,2853.31 ccw(c2975.29,2875.94) 3007.29,2875.94 3007.29,2898.16 cw(c3033.61,2898.16) U1.A2@3015,2916.77
RX_D0_N: P1.H8 U1.K11 | length 2977.1
  Top Layer w4.96: P1.H8@5160,2464.18 v2(5178.54,2445.64)
  Layer 2 w4.02: v2(3314.21,3215.99) 3325.45,3204.75 3337.31,3204.75 3339.95,3202.11 3561.94,3202.11 4250.17,2513.88 4334,2513.88 4338.65,2513.88 4349.46,2524.68 4349.46,2566.38 4365.55,2582.47 4387.43,2582.47 4403.52,2566.38 4403.52,2523.7 4414.32,2512.9 4428.73,2512.9 4439.54,2523.7 4439.54,2566.38 4455.63,2582.47 4477.51,2582.47 4493.6,2566.38 4493.6,2523.7 4504.4,2512.9 4518.81,2512.9 4529.62,2523.7 4529.62,2566.38 4545.71,2582.47 4567.59,2582.47 4583.68,2566.38 4583.68,2523.7 4594.48,2512.9 4608.89,2512.9 4619.7,2523.7 4619.7,2566.38 4635.79,2582.47 4657.67,2582.47 4673.76,2566.38 4673.76,2523.7 4684.56,2512.9 4698.97,2512.9 4709.78,2523.7 4709.78,2566.38 4725.87,2582.47 4747.75,2582.47 4763.84,2566.38 4763.84,2523.7 4774.64,2512.9 4789.05,2512.9 4799.86,2523.7 4799.86,2566.38 4815.95,2582.47 4837.83,2582.47 4853.92,2566.38 4853.92,2523.7 4864.72,2512.9 4879.13,2512.9 4889.94,2523.7 4889.94,2555.29 4906.03,2571.38 4927.91,2571.38 4944,2555.29 4944,2524.68 4954.8,2513.88 5016.39,2513.88 5069.39,2513.88 5109.75,2473.52 5159,2473.52 5166.64,2465.88 5166.64,2455.08 5162.89,2451.33 5162.89,2447.99 5165.24,2445.64 v2(5178.54,2445.64)
  Bottom Layer w4.96: U1.K11@3298.46,3200.24 v2(3314.21,3215.99)
RX_D0_P: P1.H7 U1.J12 | length 2977.1
  Top Layer w4.96: v2(5141.46,2434.36) P1.H7@5160,2415.82
  Layer 2 w4.02: v2(3314.21,3184.49) 3325.45,3195.73 3333.57,3195.73 3336.21,3193.09 3429,3193.09 3443.03,3193.09 3446.04,3190.08 3446.04,3186.64 3449.04,3183.63 3455.05,3183.63 3458.06,3186.64 3458.06,3190.08 3461.06,3193.09 3506,3193.09 3558.21,3193.09 4246.43,2504.86 4334,2504.86 4342.39,2504.86 4358.48,2520.95 4358.48,2562.65 4369.28,2573.45 4383.69,2573.45 4394.5,2562.65 4394.5,2519.97 4410.59,2503.88 4432.47,2503.88 4448.56,2519.97 4448.56,2562.65 4459.36,2573.45 4473.77,2573.45 4484.58,2562.65 4484.58,2519.97 4500.67,2503.88 4522.55,2503.88 4538.64,2519.97 4538.64,2562.65 4549.44,2573.45 4563.85,2573.45 4574.66,2562.65 4574.66,2519.97 4590.75,2503.88 4612.63,2503.88 4628.72,2519.97 4628.72,2562.65 4639.52,2573.45 4653.93,2573.45 4664.74,2562.65 4664.74,2519.97 4680.83,2503.88 4702.71,2503.88 4718.8,2519.97 4718.8,2562.65 4729.6,2573.45 4744.01,2573.45 4754.82,2562.65 4754.82,2519.97 4770.91,2503.88 4792.79,2503.88 4808.88,2519.97 4808.88,2562.65 4819.68,2573.45 4834.09,2573.45 4844.9,2562.65 4844.9,2519.97 4860.99,2503.88 4882.87,2503.88 4898.96,2519.97 4898.96,2551.56 4909.76,2562.36 4924.17,2562.36 4934.98,2551.56 4934.98,2520.95 4951.07,2504.86 5016.39,2504.86 5065.66,2504.86 5106.01,2464.5 5155.27,2464.5 5157.62,2462.15 5157.62,2458.81 5153.87,2455.06 5153.87,2445.18 5143.05,2434.36 v2(5141.46,2434.36)
  Bottom Layer w4.96: v2(3314.21,3184.49) U1.J12@3329.96,3168.74
RX_D1_N: P1.G10 U1.K10 | length 2977
  Top Layer w4.96: v2(5190.64,2546.46) P1.G10@5209.18,2565
  Layer 2 w4.02: v2(3282.72,3215.99) 3296.71,3229.98 3296.71,3249.62 3308.45,3261.36 3351.45,3261.36 3361.88,3250.93 3387,3250.93 ; 3387.02,3250.92 3571.84,3250.92 4044.38,2778.38 4047.67,2775.09 4059.56,2775.09 4072.01,2787.54 4091.37,2787.54 4104.58,2774.33 4104.58,2754.97 4089.93,2740.33 4089.93,2728.44 4097.86,2720.51 4109.74,2720.51 4124.39,2735.16 4143.75,2735.16 4156.96,2721.95 4156.96,2702.59 4142.31,2687.94 4142.31,2676.06 4150.24,2668.13 4162.13,2668.13 4173.78,2679.79 4193.14,2679.79 4206.35,2666.58 4206.35,2647.22 4196.89,2637.75 4196.89,2625.87 4212.09,2610.67 4215.38,2607.38 4215.74,2607.02 4244,2607.02 4248.65,2607.02 4257.06,2615.43 4257.06,2658.99 4270.75,2672.68 4289.43,2672.68 4303.12,2658.99 4303.12,2614.45 4311.52,2606.04 4322.73,2606.04 4331.14,2614.45 4331.14,2658.99 4344.83,2672.68 4363.51,2672.68 4377.2,2658.99 4377.2,2614.45 4385.6,2606.04 4396.81,2606.04 4405.22,2614.45 4405.22,2658.99 4418.91,2672.68 4437.59,2672.68 4451.28,2658.99 4451.28,2614.45 4459.68,2606.04 4470.89,2606.04 4479.3,2614.45 4479.3,2658.99 4492.99,2672.68 4511.67,2672.68 4525.36,2658.99 4525.36,2614.45 4533.76,2606.04 4544.97,2606.04 4553.38,2614.45 4553.38,2642.5 4567.07,2656.18 4585.75,2656.18 4599.44,2642.5 4599.44,2615.43 4607.84,2607.02 4676.56,2607.02 5074.8,2607.02 5155.85,2525.97 5188.29,2525.97 5190.64,2528.32 v2(5190.64,2546.46)
  Bottom Layer w4.96: U1.K10@3266.97,3200.24 v2(3282.72,3215.99)
RX_D1_P: P1.G9 U1.J11 | length 2977.6
  Top Layer w4.96: v2(5190.64,2496.46) P1.G9@5209.18,2515
  Layer 2 w4.02: v2(3282.71,3184.49) 3284.95,3186.73 3284.95,3197.95 3300.33,3213.32 3300.33,3221.74 3309.46,3230.87 3350.87,3230.87 3361.91,3241.91 3383.27,3241.91 ; 3383.28,3241.9 3568.1,3241.9 4038,2772 4041.29,2768.71 4043.93,2766.07 4063.29,2766.07 4075.75,2778.52 4087.63,2778.52 4095.56,2770.6 4095.56,2758.71 4080.91,2744.06 4080.91,2724.7 4094.12,2711.49 4113.48,2711.49 4128.13,2726.14 4140.02,2726.14 4147.94,2718.22 4147.94,2706.33 4133.29,2691.68 4133.29,2672.32 4146.5,2659.11 4165.86,2659.11 4177.52,2670.77 4189.41,2670.77 4197.33,2662.84 4197.33,2650.95 4187.87,2641.49 4187.87,2622.13 4205.71,2604.29 4209,2601 4212,2598 4244,2598 4252.39,2598 4266.08,2611.69 4266.08,2655.25 4274.48,2663.66 4285.69,2663.66 4294.1,2655.25 4294.1,2610.71 4307.79,2597.02 4326.47,2597.02 4340.16,2610.71 4340.16,2655.25 4348.56,2663.66 4359.77,2663.66 4368.18,2655.25 4368.18,2610.71 4381.87,2597.02 4400.55,2597.02 4414.24,2610.71 4414.24,2655.25 4422.64,2663.66 4433.85,2663.66 4442.26,2655.25 4442.26,2610.71 4455.95,2597.02 4474.63,2597.02 4488.32,2610.71 4488.32,2655.25 4496.72,2663.66 4507.93,2663.66 4516.34,2655.25 4516.34,2610.71 4530.03,2597.02 4548.71,2597.02 4562.4,2610.71 4562.4,2638.76 4570.8,2647.16 4582.01,2647.16 4590.42,2638.76 4590.42,2611.69 4604.11,2598 4676.56,2598 5071.07,2598 5152.12,2516.95 5188.29,2516.95 5190.64,2514.6 v2(5190.64,2496.46)
  Bottom Layer w4.96: v2(3282.71,3184.49) U1.J11@3298.46,3168.74
RX_D2_N: P1.H11 U1.K9 | length 2977.1
  Top Layer w4.96: P1.H11@5160,2614.18 v2(5178.54,2595.64)
  Layer 2 w4.02: v2(3251.22,3215.99) 3249.16,3218.05 3249.16,3229.89 3236.67,3242.39 3236.67,3252.57 3245.46,3261.36 3257.59,3261.36 3268.84,3272.61 3268.84,3284.73 3276.97,3292.86 3289.09,3292.86 3315.25,3319.02 3603.74,3319.02 4226.74,2696.02 4540,2696.02 4544.65,2696.02 4555.46,2706.83 4555.46,2721.83 4571.55,2737.92 4593.43,2737.92 4609.52,2721.83 4609.52,2667.56 4620.32,2656.76 4634.73,2656.76 4645.54,2667.56 4645.54,2721.83 4661.63,2737.92 4683.51,2737.92 4699.6,2721.83 4699.6,2667.56 4710.4,2656.76 4724.81,2656.76 4735.62,2667.56 4735.62,2721.83 4751.71,2737.92 4773.59,2737.92 4789.68,2721.83 4789.68,2667.56 4800.48,2656.76 4814.89,2656.76 4825.7,2667.56 4825.7,2721.83 4841.79,2737.92 4863.67,2737.92 4879.76,2721.83 4879.76,2667.56 4890.56,2656.76 4904.97,2656.76 4915.78,2667.56 4915.78,2718.84 4931.87,2734.93 4953.75,2734.93 4969.84,2718.84 4969.84,2679.93 4980.64,2669.12 4995.05,2669.12 5005.86,2679.93 5021.95,2696.02 5041.67,2696.02 5044.03,2696.02 5130.68,2609.37 5154.74,2609.37 5162.38,2601.73 5162.38,2597.99 5164.73,2595.64 v2(5178.54,2595.64)
  Bottom Layer w4.96: U1.K9@3235.47,3200.24 v2(3251.22,3215.99)
RX_D2_P: P1.H10 U1.J10 | length 2977.1
  Top Layer w4.96: v2(5141.46,2584.36) P1.H10@5160,2565.82
  Layer 2 w4.02: v2(3251.22,3184.49) 3265.1,3198.37 3265.1,3256.12 3274.08,3265.1 3288.47,3265.1 3296.6,3273.23 3296.6,3287.62 3318.98,3310 3376,3310 3390.03,3310 3393.04,3306.99 3393.04,3304.42 3396.04,3301.41 3402.05,3301.41 3405.06,3304.42 3405.06,3306.99 3408.06,3310 3549,3310 3600,3310 4223,2687 4540,2687 4548.39,2687 4564.48,2703.09 4564.48,2718.09 4575.28,2728.9 4589.69,2728.9 4600.5,2718.09 4600.5,2663.83 4616.59,2647.74 4638.47,2647.74 4654.56,2663.83 4654.56,2718.09 4665.36,2728.9 4679.77,2728.9 4690.58,2718.09 4690.58,2663.83 4706.67,2647.74 4728.55,2647.74 4744.64,2663.83 4744.64,2718.09 4755.44,2728.9 4769.85,2728.9 4780.66,2718.09 4780.66,2663.83 4796.75,2647.74 4818.63,2647.74 4834.72,2663.83 4834.72,2718.09 4845.52,2728.9 4859.93,2728.9 4870.74,2718.09 4870.74,2663.83 4886.83,2647.74 4908.71,2647.74 4924.8,2663.83 4924.8,2715.1 4935.6,2725.91 4950.01,2725.91 4960.82,2715.1 4960.82,2676.19 4976.91,2660.1 4998.79,2660.1 5014.88,2676.19 5025.68,2687 5040.29,2687 5041.67,2685.62 5126.94,2600.35 5151,2600.35 5153.36,2597.99 5153.36,2594.66 5143.05,2584.36 v2(5141.46,2584.36)
  Bottom Layer w4.96: v2(3251.22,3184.49) U1.J10@3266.97,3168.74
RX_D3_N: P1.D12 U1.K8 | length 2977.2
  Top Layer w4.96: P1.D12@5360,2664.18 v2(5378.54,2645.64)
  Layer 2 w4.02: v2(3188.22,3215.99) 3199.12,3205.09 3202.45,3205.09 3204.8,3207.45 3204.8,3222.44 3180.98,3246.26 3180.98,3298.74 3256.26,3374.02 3274,3374.02 3276.01,3374.02 3279.02,3377.03 3279.02,3381.01 3282.02,3384.02 3288.03,3384.02 3291.04,3381.01 3291.04,3376.03 3294.04,3373.02 3300.05,3373.02 3303.06,3376.03 3303.06,3378.38 3306.06,3381.39 3312.07,3381.39 3315.08,3378.38 3315.08,3377.03 3318.08,3374.02 3356,3374.02 3387,3374.02 3391.65,3374.02 3394.66,3377.02 3394.66,3377.92 3402.95,3386.21 3416.43,3386.21 3424.72,3377.92 3424.72,3377.02 3427.72,3374.02 3531,3374.02 3638.41,3374.02 3639.41,3373.02 3640.32,3373.02 4227.62,2785.73 4235.3,2778.04 4252.28,2778.04 4264.28,2790.05 4264.28,2808.54 4280.99,2825.25 4303.64,2825.25 4320.34,2808.54 4320.34,2776.05 4332.35,2764.04 4348.36,2764.04 4360.36,2776.05 4360.36,2808.54 4377.07,2825.25 4399.72,2825.25 4416.42,2808.54 4416.42,2776.05 4428.43,2764.04 4444.44,2764.04 4456.44,2776.05 4456.44,2808.54 4473.15,2825.25 4495.8,2825.25 4512.5,2808.54 4512.5,2785.03 4524.51,2773.02 4558.64,2773.02 5049.3,2773.02 5100.3,2722.02 5221.86,2722.02 5295.63,2648.24 5347.21,2648.24 5349.81,2645.64 v2(5378.54,2645.64)
  Bottom Layer w4.96: v2(3188.22,3215.99) U1.K8@3203.97,3200.24
RX_D3_P: P1.D11 U1.J9 | length 2977.1
  Top Layer w4.96: v2(5341.46,2634.36) P1.D11@5360,2615.82
  Layer 2 w4.02: v2(3219.72,3184.49) 3208.82,3195.39 3208.82,3198.72 3213.82,3203.71 3213.82,3226.18 3190,3250 3190,3295 3197,3302 3206.92,3311.92 3211.17,3311.92 3213.99,3309.1 3218.24,3309.1 3222.49,3313.35 3222.49,3317.6 3218.96,3321.13 3218.96,3325.38 3223.21,3329.63 3227.46,3329.63 3230.99,3326.1 3235.24,3326.1 3239.49,3330.35 3239.49,3334.6 3235.96,3338.13 3235.96,3342.38 3240.21,3346.63 3244.46,3346.63 3247.99,3343.1 3252.24,3343.1 3256.49,3347.35 3256.49,3351.6 3253.67,3354.42 3253.67,3358.67 3260,3365 3268,3365 3387,3365 3395.39,3365 3403.68,3373.29 3403.68,3374.18 3406.68,3377.19 3412.69,3377.19 3415.7,3374.18 3415.7,3373.29 3423.99,3365 3531,3365 3637,3365 4227.62,2774.38 4231.98,2770.02 4255.6,2770.02 4272.3,2786.73 4272.3,2805.22 4284.31,2817.23 4300.32,2817.23 4312.32,2805.22 4312.32,2772.72 4329.03,2756.02 4351.68,2756.02 4368.38,2772.72 4368.38,2805.22 4380.39,2817.23 4396.4,2817.23 4408.4,2805.22 4408.4,2772.72 4425.11,2756.02 4447.76,2756.02 4464.46,2772.72 4464.46,2805.22 4476.47,2817.23 4492.48,2817.23 4504.48,2805.22 4504.48,2781.7 4521.19,2765 4558.64,2765 4967,2765 4981.03,2765 4984.04,2761.99 4984.04,2758.01 4987.04,2755 4993.05,2755 4996.06,2758.01 4996.06,2761.99 4999.06,2765 5005.07,2765 5008.08,2761.99 5008.08,2759.35 5011.08,2756.35 5017.09,2756.35 5020.1,2759.35 5020.1,2761.99 5023.1,2765 5038.05,2765 5045.97,2765 5096.97,2714 5218.53,2714 5292.31,2640.22 5333.04,2640.22 5338.9,2634.36 v2(5341.46,2634.36)
  Bottom Layer w4.96: v2(3219.72,3184.49) U1.J9@3235.47,3168.74
RX_D4_N: P1.C11 U1.K7 | length 2976.8
  Top Layer w4.96: P1.C11@5410,2614.18 v2(5428.54,2595.64)
  Layer 2 w4.02: v2(3188.23,3184.49) 3188.23,3185 3174.12,3199.12 3172.7,3199.12 3150.98,3220.84 3150.98,3233.59 3142.85,3241.72 3142.85,3256.87 3150.98,3265 3150.98,3312.44 3292.53,3453.99 3375,3453.99 3377.01,3453.99 3379.41,3456.39 3379.41,3461.59 3381.82,3463.99 3389.03,3463.99 3391.43,3461.59 3391.43,3456.39 3393.84,3453.99 3456,3453.99 3623.44,3453.99 3624.44,3452.99 3625.35,3452.99 4224.34,2854 4576,2854 4800.89,2854 4812.59,2842.29 4812.59,2827.91 4819.6,2820.91 4825.61,2820.91 4832.61,2827.91 4832.61,2842.29 4844.32,2854 4852,2854 4991,2854 5095.98,2749.02 5217.54,2749.02 5287.56,2679 5376.16,2679 5407.02,2648.14 5407.02,2602.02 5413.4,2595.64 v2(5428.54,2595.64)
  Bottom Layer w4.96: U1.K7@3172.48,3200.24 v2(3188.23,3184.49)
RX_D4_P: P1.C10 U1.J8 | length 2978.4
  Top Layer w4.96: v2(5391.46,2584.36) P1.C10@5410,2565.82
  Layer 2 w4.02: v2(3219.72,3152.99) 3219.72,3155.28 3217.43,3155.28 3205.84,3166.87 3205.84,3186.52 3190.25,3202.11 3182.47,3202.11 3160,3224.58 3160,3231.23 3162.35,3233.59 3162.48,3233.59 3170.61,3241.72 3170.61,3254.39 3160,3265 3160,3308.7 3296.27,3444.97 3622.03,3444.97 4221.02,2845.98 4576,2845.98 4797.57,2845.98 4804.57,2838.97 4804.57,2824.59 4816.28,2812.89 4828.93,2812.89 4840.63,2824.59 4840.63,2838.97 4847.64,2845.98 4852,2845.98 4987.68,2845.98 5092.66,2741 5214.22,2741 5284.24,2670.98 5372.83,2670.98 5399,2644.82 5399,2595.07 5391.46,2587.53 v2(5391.46,2584.36)
  Bottom Layer w4.96: U1.J8@3203.97,3168.74 v2(3219.72,3152.99)
RX_D5_N: P1.H14 U1.J7 | length 2975
  Top Layer w4.96: v3(4992.23,2438.28) 5003.5,2427 5033.34,2427 5066,2459.66 5066,2719.67 5090.81,2744.48 5157.09,2744.48 5160,2747.39 P1.H14@5160,2765
  Layer 2 w4.02: v2(3188.23,3152.99) 3202.11,3139.11 3225.47,3139.11 3235.47,3149.11 3235.47,3156.88 3245.47,3166.87 3288.46,3166.87 3298.61,3156.73 3325.35,3156.73 3344.81,3176.18 3401.57,3176.18 3421.38,3156.38 3508.62,3156.38 3798.5,2866.5 3801.79,2863.21 3813.68,2863.21 3829.73,2879.26 3849.09,2879.26 3862.3,2866.05 3862.3,2846.69 3839.78,2824.17 3839.78,2812.29 3847.7,2804.36 3859.59,2804.36 3882.11,2826.88 3901.47,2826.88 3914.68,2813.67 3914.68,2794.31 3892.16,2771.79 3892.16,2759.9 3900.09,2751.98 3911.98,2751.98 3934.5,2774.5 3953.86,2774.5 3967.06,2761.29 3967.06,2741.93 3944.54,2719.41 3944.54,2707.52 3952.47,2699.6 3964.36,2699.6 3986.88,2722.12 4006.24,2722.12 4019.45,2708.91 4019.45,2689.55 4003.39,2673.49 4003.39,2661.61 4037.71,2627.29 4041,2624 4255.98,2409.02 4684.26,2409.02 4685.26,2410.02 4689,2410.02 4860,2410.02 4928.31,2410.02 4945.48,2427.19 4981.14,2427.19 v3(4992.23,2438.28)
  Bottom Layer w4.96: U1.J7@3172.48,3168.74 v2(3188.23,3152.99)
RX_D5_P: P1.H13 U1.H8 | length 2975.8
  Top Layer w4.96: v3(4992.23,2407.08) 5003.14,2418 5037.01,2418 5074.96,2455.95 5074.96,2715.96 5094.52,2735.52 5157.09,2735.52 5160,2732.61 P1.H13@5160,2715
  Layer 2 w4.02: v2(3188.22,3121.49) 3202.09,3107.62 3225.47,3107.62 3236.25,3118.39 3236.25,3126.16 3247.02,3136.93 3286.29,3136.93 3297.06,3147.71 3329.08,3147.71 3348.54,3167.16 3397.84,3167.16 3417.64,3147.36 3504.89,3147.36 3792.12,2860.12 3795.41,2856.83 3798.05,2854.19 3817.41,2854.19 3833.47,2870.24 3845.35,2870.24 3853.28,2862.32 3853.28,2850.43 3830.76,2827.91 3830.76,2808.55 3843.97,2795.34 3863.33,2795.34 3885.85,2817.86 3897.74,2817.86 3905.66,2809.94 3905.66,2798.05 3883.14,2775.53 3883.14,2756.17 3896.35,2742.96 3915.71,2742.96 3938.23,2765.48 3950.12,2765.48 3958.04,2757.55 3958.04,2745.67 3935.52,2723.15 3935.52,2703.79 3948.73,2690.58 3968.09,2690.58 3990.61,2713.1 4002.5,2713.1 4010.43,2705.17 4010.43,2693.28 3994.37,2677.23 3994.37,2657.87 4031.33,2620.91 4034.62,2617.62 4252.24,2400 4688,2400 4689,2401 4860,2401 4932.05,2401 4949.22,2418.17 4981.14,2418.17 v3(4992.23,2407.08)
  Bottom Layer w4.96: v2(3188.22,3121.49) U1.H8@3203.97,3137.24
RX_EXT_LO: TP102.1 U1.G1 | length 294.5
  Bottom Layer w11.55: v1(2688.72,3105.51) 2885.99,3105.51 ; 2886.23,3105.75 U1.G1@2983.5,3105.75